# Altium PCB Lesson_06_1.PcbDoc
Units mil, origin at the board's own origin, x right, y up, seen from the top; angles counter-clockwise.
Board outline 3140 x 1885 mil, 2 copper layers (Top Layer, Bottom Layer); 17 components, 12 nets, 36 pads, 0 vias.
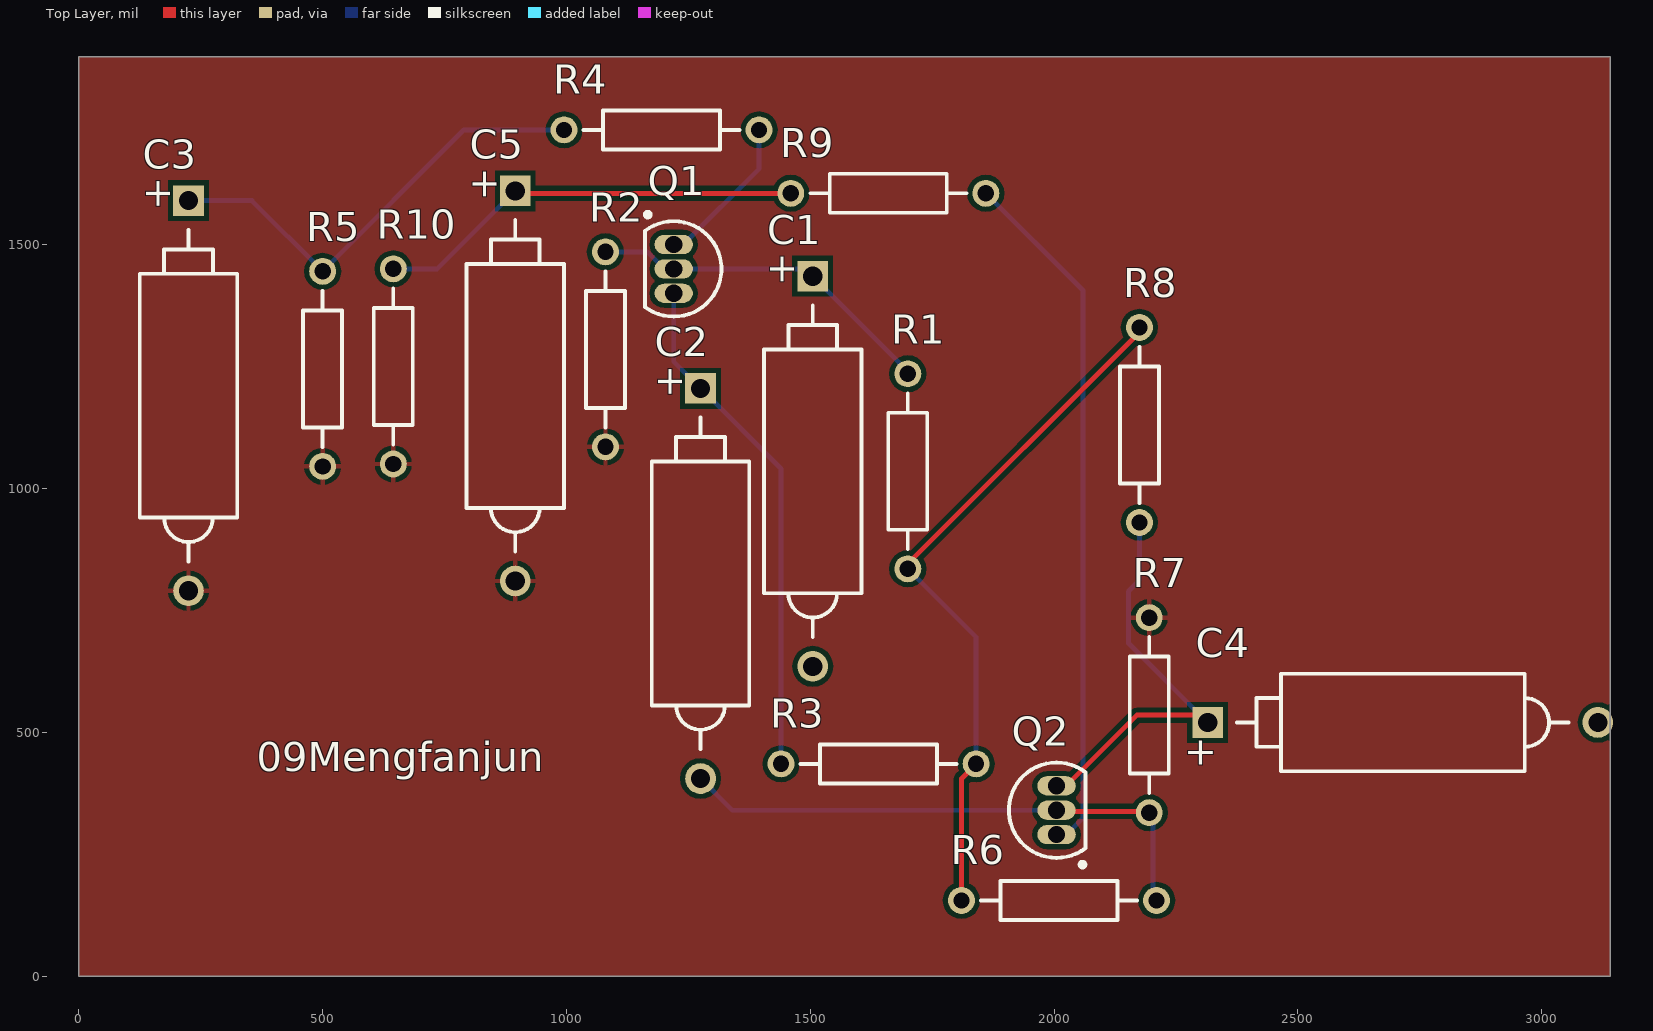
[diagram p0: Top Layer view]
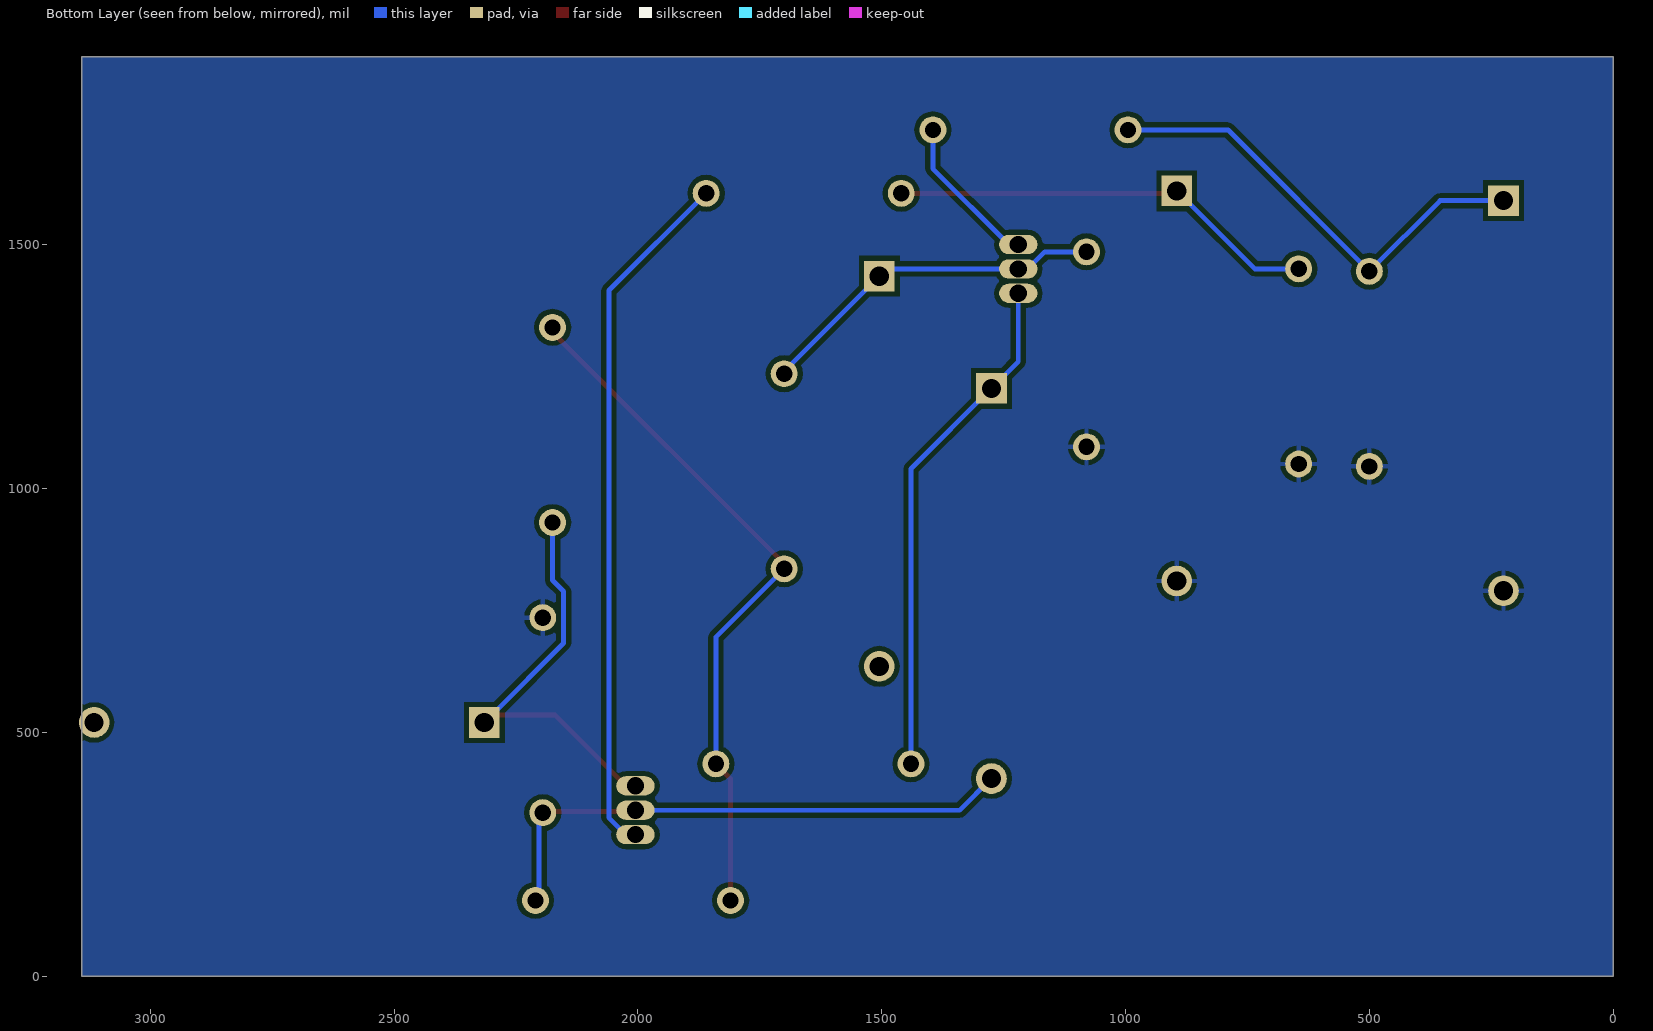
[diagram p1: Bottom Layer view, seen from below]

## Layer stack, top to bottom
Top Solder: solder mask 0.4, Solder Resist, Dk 3.5
Top Layer: signal copper 1.4
Dielectric 1: dielectric 12.6, FR-4, Dk 4.8
Bottom Layer: signal copper 1.4
Bottom Solder: solder mask 0.4, Solder Resist, Dk 3.5

## Board outline
0,0 3140,0 3140,1885 0,1885

## Design rules (kind name [scope] priority, off if disabled: settings)
Clearance [All] p1: gap=10 ignorepadtopadclearanceinfootprint=FALSE except(0: Arc-Hole Track-Hole SMDPad-Hole THPad-Hole Via-Hole Fill-Hole Poly-Hole Region-Hole Text-Hole)
PolygonConnect [All] p1: connectstyle=Relief reliefconductorwidth=10 reliefentries=4 polygonreliefangle="90 Angle" airgapwidth=10
RoutingVias [All] p1: holewidth=28 width=50 viastyle="Through Hole" minholewidth=28 minwidth=50 maxholewidth=28 maxwidth=50
SolderMaskExpansion [All] p1: expansion=4
Width [All] p1: maxlimit=10 minlimit=10 preferedwidth=10
30 further rules are at their usual default settings.

## Components (designator, comment, footprint, x,y, rotation, side; value= is the part's Value field where it differs from the comment)
C1 "Cap Pol2" POLAR0.8 1505,1035 r90 top value=1.0uF
C2 "Cap Pol2" POLAR0.8 1275,805 r90 top value=1.0uF
C3 "Cap Pol2" POLAR0.8 225,1190 r90 top value=47uF
C4 "Cap Pol2" POLAR0.8 2715,520 r180 top value=1.0uF
C5 "Cap Pol2" POLAR0.8 895,1210 r90 top value=47uF
Q1 "2N3904" TO-92A 1220,1450 r180 top
Q2 "2N3904" TO-92A 2005,340 r0 top
R1 "Res2" AXIAL-0.4 1700,1035 r270 top value=51K
R2 "Res2" AXIAL-0.4 1080,1285 r90 top value=10K
R3 "Res2" AXIAL-0.4 1640,435 r0 top value=5.1K
R4 "Res2" AXIAL-0.4 1195,1735 r0 top value=250
R5 "Res2" AXIAL-0.4 500,1245 r90 top value=750
R6 "Res2" AXIAL-0.4 2010,155 r180 top value=51K
R7 "" AXIAL-0.4 2195,535 r270 top value=10K
R8 "Res2" AXIAL-0.4 2175,1130 r90 top value=5.1K
R9 "Res2" AXIAL-0.4 1660,1605 r0 top value=250
R10 "Res2" AXIAL-0.4 645,1250 r90 top value=750

## Footprints (in the part's own frame and the unit in brackets; to place one, negate y for a bottom-side part, rotate by r counter-clockwise, add the part's x,y. Pads: shape width x height; smd on the part's side, far side on the other; paste and mask are expansions set on the pad)
AXIAL-0.4 [mm] "Axial Device, Thru-Hole; 2 Leads; 0.4 in Pin Spacing"
  round 1.4 hole 0.85: 1(-5.08,0) 2(5.08,0)
  silkscreen extent -4.06,-1.02 4.06,1.02
POLAR0.8 [mm] "Polarized Capacitor; 2 Leads"
  rect 1.6x1.6 hole 1: 1(10.16,0)
  round 1.6 hole 1: 2(-10.16,0)
  silkscreen extent -8.64,-2.54 8.64,2.54
TO-92A [mm] "TO, Flat Index; 3 In-Line, Axial Leads; Body Dia. 4.5mm; Leads 0.51 x 0.48 mm (max)"
  oval 2x1 hole 0.9: 1(0,-1.27) 2(0,0) 3(0,1.27)
  silkscreen extent -2.48,-2.95 1.5,2.48, body extent -2.48,-2.5 1.5,2.5, height 6.86

## Part data
C1 C2 C3 C4 C5: "Polarized Capacitor (Axial)", LatestRevisionDate=17-Jul-2002, LatestRevisionNote="Re-released for DXP Platform.", PackageDescription="Polarized Capacitor; 2 Leads", PackageReference=POLAR0.8, Published=8-Jun-2000, Publisher="Altium Limited"
Q1 Q2: "NPN General Purpose Amplifier", ComponentLink1Description="Manufacturer Link", ComponentLink1URL=http://www.fairchildsemi.com/, ComponentLink2Description=Datasheet, ComponentLink2URL=http://www.fairchildsemi.com/ds/2N%2F2N3904.pdf, DatasheetVersion=1997, LatestRevisionDate=15-Jan-2003, LatestRevisionNote="PCB Footprint 'BCY-W3/D4.7' replaced", PackageDescription="TO, Flat Index; 3 In-Line, Axial Leads; Body Dia. 4.5mm; Leads 0.51 x 0.48 mm (max)", PackageReference=TO-92A, PackageVersion=Sep-1998, Published=8-Jun-2000, Publisher="Altium Limited"
R1 R2 R3 R4 R5 R6 R8 R9 R10: "Resistor", LatestRevisionDate=17-Jul-2002, LatestRevisionNote="Re-released for DXP Platform.", PackageDescription="Axial Device, Thru-Hole; 2 Leads; 0.4 in Pin Spacing", PackageReference=AXIAL-0.4, Published=8-Jun-2000, Publisher="Altium Limited"
R7: library part Res2, "Resistor", LatestRevisionDate=17-Jul-2002, LatestRevisionNote="Re-released for DXP Platform.", PackageDescription="Axial Device, Thru-Hole; 2 Leads; 0.4 in Pin Spacing", PackageReference=AXIAL-0.4, Published=8-Jun-2000, Publisher="Altium Limited"

## Nets (pads, with @x,y where several pads share a name; then routed paths per layer and width w, separated by ;. In a path a pad name is that pad's centre, name@x,y a point inside that pad or via, vN(x,y) a via of type N, cw(c..) or ccw(c..) an arc to the next point about the centre after c; other vN are vias at no path point)
+12: R1.2 R3.2 R6.2 R8.2 | length 1442.2
  Top Layer w10: R1.2 1700,845 2175,1320 R8.2 ; R6.2 1810,404.81 1840,434.81 R3.2
  Bottom Layer w10: R1.2 1840,695 R3.2
GND: C3.2 C5.2 R2.1 R5.1 R7.1 R10.1
NetC1_1: C1.1 Q1.2 R1.1 R2.2 | length 726.5
  Bottom Layer w10: R2.2 1165.32,1485 1200.32,1450 Q1.2 1490,1450 C1.1 1700,1240 R1.1
NetC2_1: C2.1 Q1.3 R3.1 | length 1056.1
  Bottom Layer w10: Q1.3 1220,1260 C2.1 1440,1040 R3.1
NetC2_2: C2.2 Q2.2 R6.1 R7.2 | length 1135.2
  Top Layer w10: Q2.2 2007.5,337.5 2192.5,337.5 R7.2
  Bottom Layer w10: C2.2 1340,340 Q2.2 ; R7.2 2202.5,327.5 2202.5,162.5 R6.1
NetC3_1: C3.1 R4.1 R5.2 | length 950.2
  Bottom Layer w10: C3.1 355,1590 R5.2 790,1735 R4.1
NetC4_1: C4.1 Q2.3 R8.1 | length 820.5
  Top Layer w10: Q2.3 2024.68,390 2169.68,535 C4.1@2300,535
  Bottom Layer w10: R8.1 2175,811.45 2152.44,788.9 2152.44,682.56 C4.1@2300,535
NetC5_1: C5.1 R9.1 R10.2 | length 883.3
  Top Layer w10: C5.1 900,1605 R9.1
  Bottom Layer w10: R10.2 735,1450 C5.1
NetQ1_1: Q1.1 R4.2 | length 319
  Bottom Layer w10: Q1.1 1239.68,1500 1395,1655.32 R4.2
NetQ2_1: Q2.1 R9.2 | length 1431.6
  Bottom Layer w10: R9.2 2059.37,1405.63 2059.37,324.68 2024.68,290 Q2.1
VIN: C1.2
VOUT: C4.2

## Polygon pours and split planes (outlines as drawn)
GND on Bottom Layer "Top Layer-No Net" (solid, pour order 0): 0,0 3140,0 3140,1885 0,1885
GND on Top Layer "Top Layer-No Net1" (solid, pour order 1): 0,0 3140,0 3140,1885 0,1885

## Silkscreen, mask and mechanical layers (free items; w line width, h text height)
Top Overlay:
  text "09Mengfanjun" at 365,420 h60
Mechanical 1:
  the board outline again, w10

## Text inside footprints (layer, text, board x,y; h text height)
C1: Top Overlay "+" at 1467.6,1415 h59.06 r90
C2: Top Overlay "+" at 1237.6,1185 h59.06 r90
C3: Top Overlay "+" at 187.6,1570 h59.06 r90
C4: Top Overlay "+" at 2335,482.6 h59.06 r180
C5: Top Overlay "+" at 857.6,1590 h59.06 r90